# Altium PCB PCB.PcbDoc
Units mm, origin at the board's own origin, x right, y up, seen from the top; angles counter-clockwise.
Board outline 43 x 24 mm, 2 copper layers (Top Layer, Bottom Layer); 9 components, 8 nets, 23 pads, 6 vias.
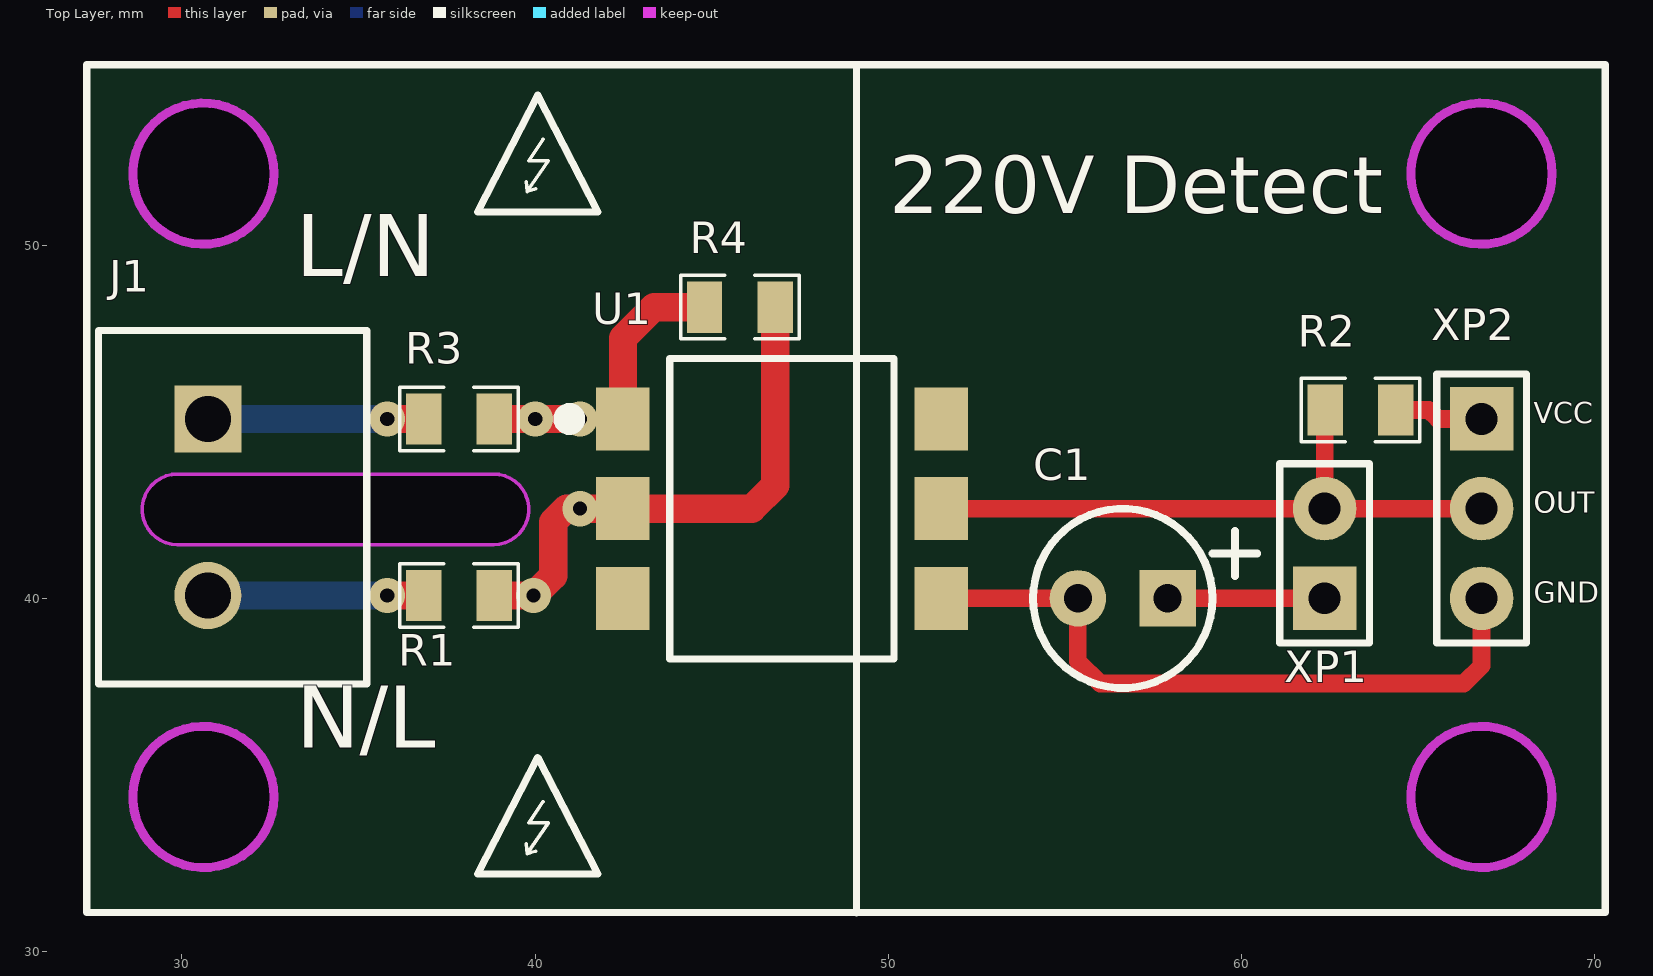
[diagram p0: Top Layer view]
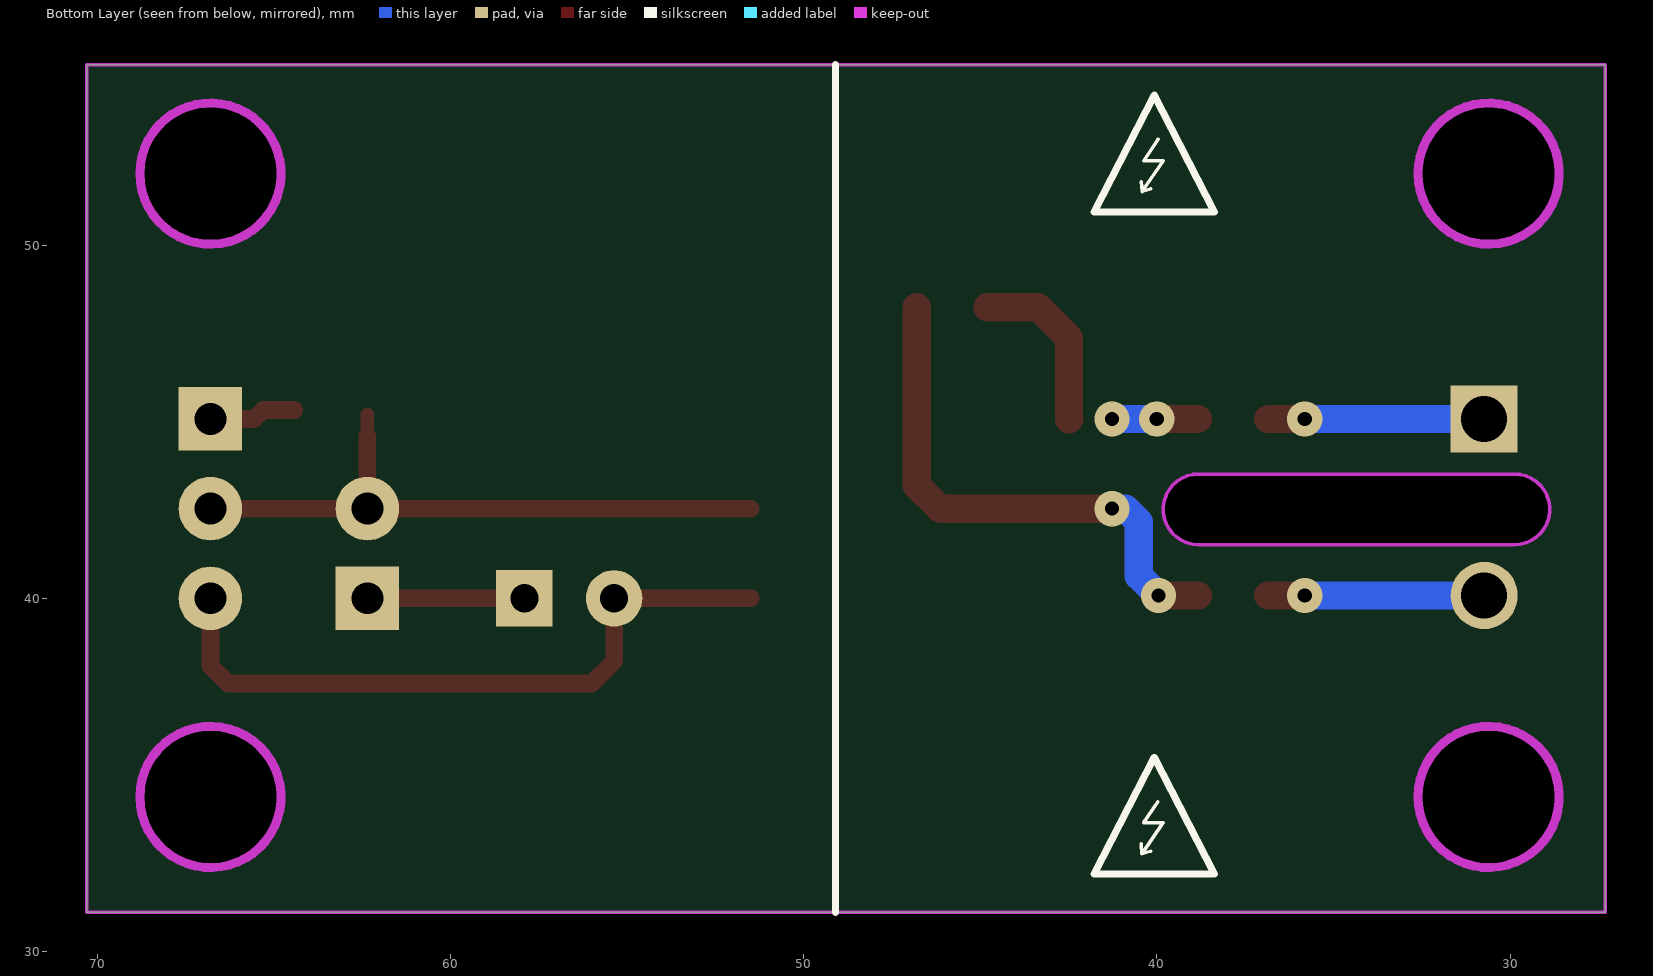
[diagram p1: Bottom Layer view, seen from below]
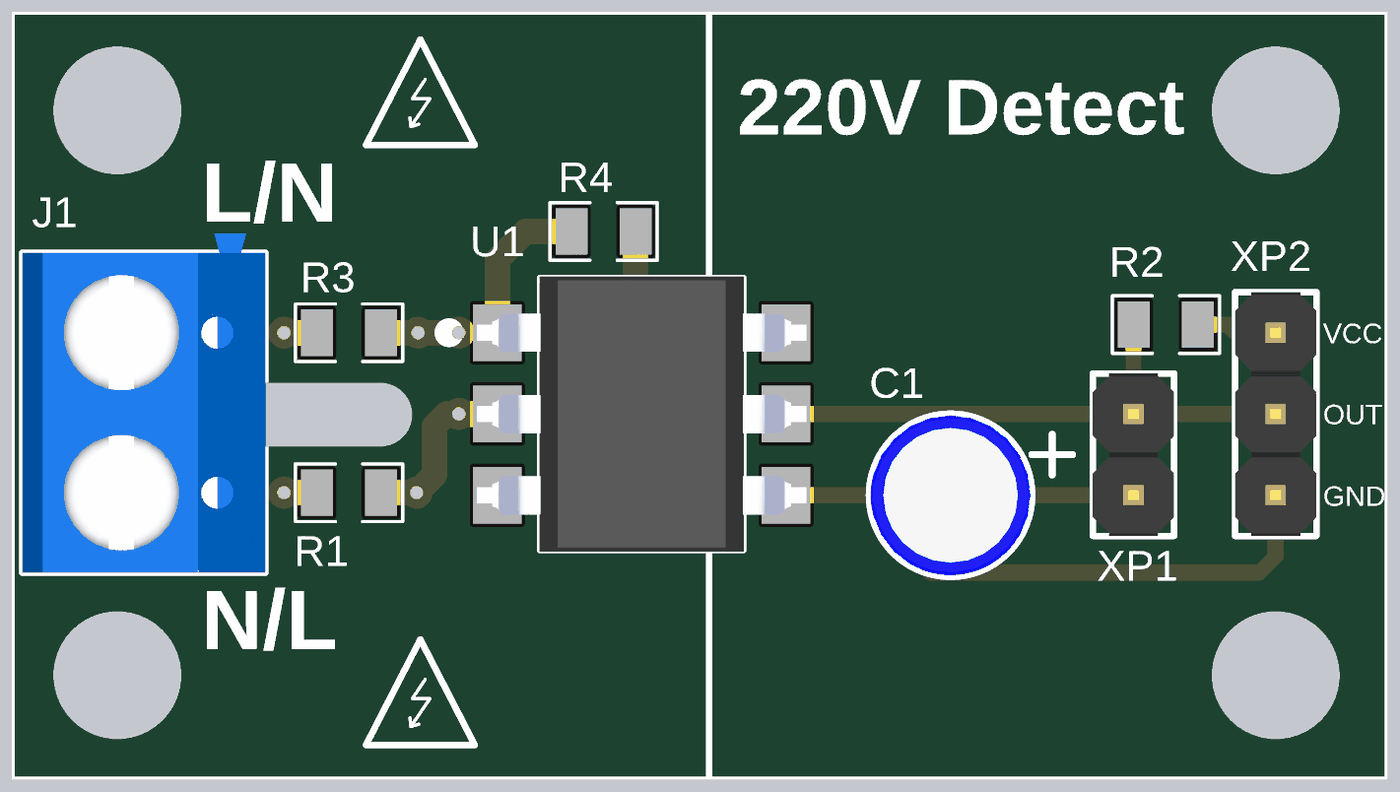
[diagram p2: 3D render of the assembled board from above, using the file's embedded part models]

## Layer stack, top to bottom
Top Solder: solder mask 0.0102, Solder Resist, Dk 3.5
Top Layer: signal copper 0.0356
Dielectric 1: dielectric 0.32, FR-4, Dk 4.8
Bottom Layer: signal copper 0.0356
Bottom Solder: solder mask 0.0102, Solder Resist, Dk 3.5

## Board outline
27.305,31.115 70.305,31.115 70.305,55.115 27.305,55.115
cut-out: 29.875,41.525 38.825,41.525 ccw(c38.825,42.525) 38.825,43.525 29.875,43.525 ccw(c29.875,42.525)
cut-out: 64.802,52.032 ccw(c66.802,52.032) 66.802,50.032 ccw(c66.802,52.032) 68.802,52.032 ccw(c66.802,52.032) 66.802,54.032 ccw(c66.802,52.032)
cut-out: 64.802,34.381 ccw(c66.802,34.381) 66.802,32.381 ccw(c66.802,34.381) 68.802,34.381 ccw(c66.802,34.381) 66.802,36.381 ccw(c66.802,34.381)
cut-out: 30.607,32.381 cw(c30.607,34.381) 28.607,34.381 cw(c30.607,34.381) 30.607,36.381 cw(c30.607,34.381) 32.607,34.381 cw(c30.607,34.381)
cut-out: 30.607,50.032 cw(c30.607,52.032) 28.607,52.032 cw(c30.607,52.032) 30.607,54.032 cw(c30.607,52.032) 32.607,52.032 cw(c30.607,52.032)

## Design rules (kind name [scope] priority, off if disabled: settings)
Clearance [All] p1: gap=0.254 ignorepadtopadclearanceinfootprint=FALSE except(0: Arc-Hole Track-Hole SMDPad-Hole THPad-Hole Via-Hole Fill-Hole Poly-Hole Region-Hole Text-Hole)
PolygonConnect [All] p1: connectstyle=Relief reliefconductorwidth=0.254 reliefentries=4 polygonreliefangle="90 Angle" airgapwidth=0.254
RoutingVias [All] p1: holewidth=0.711 width=1.27 viastyle="Through Hole" minholewidth=0.711 minwidth=1.27 maxholewidth=0.711 maxwidth=1.27
SolderMaskExpansion [All] p1: expansion=0.102
Width [All] p1: maxlimit=1 minlimit=0.254 preferedwidth=0.5 minimp=50.000000 maximp=50.000000 favimp=50.000000
30 further rules are at their usual default settings.

## Components (designator, comment, footprint, x,y, rotation, side; value= is the part's Value field where it differs from the comment)
C1 "CAP_ELEC_5*11" CAP_ELEC_5*11 56.642,40.005 r180 top
J1 "KF120-02P-14" DG301-5.0-02P-1X 30.734,45.085 r270 top
R1 "RES_SMD" RES0805 37.846,40.085 r0 top
R2 "RES_SMD" RES0805 63.373,45.339 r0 top
R3 "RES_SMD" RES0805 37.846,45.085 r0 top
R4 "RES_SMD" RES0805 45.8,48.25 r180 top
U1 "H11AA1SR2M" SMT-6 46.99,42.545 r0 top
XP1 "PLS-02" PLS-02 62.357,40.005 r90 top
XP2 "PLS-03" PLS-03 66.802,45.085 r270 top

## Footprints (in the part's own frame and the unit in brackets; to place one, negate y for a bottom-side part, rotate by r counter-clockwise, add the part's x,y. Pads: shape width x height; smd on the part's side, far side on the other; paste and mask are expansions set on the pad)
CAP_ELEC_5*11 [mm]
  round 1.6 hole 0.8: 1(1.27,0)
  rect 1.6x1.6 hole 0.8: 2(-1.27,0)
  silkscreen extent -3.81,-2.54 2.54,2.54, body extent -2.5,-2.5 2.5,2.5, height 11.9
DG301-5.0-02P-1X [mm]
  rect 1.9x1.9 hole 1.3 mask+0.102: 1(0,0)
  round 1.9 hole 1.3 mask+0.102: 2(5,0)
  silkscreen extent -2.5,-3.1 7.5,4.5, body extent -3.1,-3.1 7.5,4.5, height 10
PLS-02 [mm]
  rect 1.8x1.8 hole 0.9: 1(0,0)
  round 1.8 hole 0.9: 2(2.54,0)
  silkscreen extent -1.27,-1.27 3.81,1.27, body extent -1.27,-1.27 3.81,1.27, height 8.6
PLS-03 [mm]
  rect 1.8x1.8 hole 0.9: 1(0,0)
  round 1.8 hole 0.9: 2(2.54,0) 3(5.08,0)
  silkscreen extent -1.27,-1.27 6.35,1.27, body extent -1.27,-1.27 6.35,1.27, height 8.6
RES0805 [mm] "Chip Resistor, 2-Leads, Body 2,00x1,20mm, IPC Medium Density"
  rect 1x1.45 smd: 1(-1,0) 2(1,0)
  silkscreen extent -1.68,-0.9 1.68,0.9, body extent -1,-0.6 1,0.6, height 0.4
SMT-6 [mm] "SMT, 6-Leads, Body 8.51x6.35mm, Pitch 2.54mm"
  rect 1.52x1.78 smd: 1(-4.51,2.54) 2(-4.51,0) 3(-4.51,-2.54) 4(4.51,-2.54) 5(4.51,0) 6(4.51,2.54)
  silkscreen extent -6.22,-4.26 3.17,4.26, body extent -5.15,-4.3 5.15,4.3, height 4.38

## Part data
C1: "Electrolitic capacitor"
J1: library part Terminal_2, "Euro Terminal Block, 6 A, 150 V, -40 to 105 degC, Pitch 2.54 mm, 1x2 Position, Height 8.6 mm, Tail Length 3.3 mm", Color=Green, Contact Resistance="20 mOhm", Insulation Resistance="5000 MOhm / 1000 V", Manufacturer="Cixi KaiFeng", Rated Current="6 A", Rated Voltage="150 V", Temp. Range="-40 to 105 degC", Withstanding Voltage="AC 1500 V / 1 Min", ComponentLink1Description="Manufacturer URL", ComponentLink1URL=http://www.nb-kaifeng.com/, ComponentLink2Description=Datasheet, ComponentLink2URL=http://www.nb-kaifeng.com/upload/editor/ext_pdf/201305290533202245.pdf, Contact=Brass, Mounting Technology="Through Hole", No. of Pole=2, PackageDescription="Terminal Block, Pitch 2.54 mm, 1 x 2 Position, Height 8.6 mm, Tail Length 3.3 mm", PackageReference=KF120-2, PartNumber=KF120-02P-14, Pitch="Single Pitch"
U1: library part H11AA1, "AC Input Phototansistor Optocoupler, 1.17 V, 50 mA, -40 to 100 degC, 6-Pin SMT, RoHS, Tape and Reel", Current - DC Forward (If) (Max)=60mA, Current - Output / Channel=50mA, Current Transfer Ratio (Max)=-, Current Transfer Ratio (Min)=20%@10mA, Manufacturer="Fairchild Semiconductor", Operating temperature=-40癈~100癈, Package / Case=6-SMD, Package Description="6-Pin Surface Mount Device, Body 8.51 x 6.35 mm, Pitch 2.54 mm", Package Reference=SMT-6, Standard Package=1, Voltage - Forward (Vf) (Typ)=1.17V, Voltage - Isolation=4170Vrms, Voltage - Output (Max)=30V, Category=Isolators, Datasheet URL=https://www.fairchildsemi.com/datasheets/H1/H11AA1M.pdf, Datasheet Version="Rev. 1.3, 04/2015", Family=Optoisolators-Transistor,PhotovoltaicOutput, Input Type=AC,DC, Manufacturer URL=https://www.fairchildsemi.com/, Mounting Technology=SurfaceMount, Mounting Type=SurfaceMount, Number of Channels=1, Online Catalog=H11AA1M,2M,3M,4MSeries, Other Names=H11AA1SR2MDKR, Output Type=TransistorwithBase, Packaging=Digi-Reel®, Rise / Fall Time (Typ)=-, Series=-, Supplier Device Package=6-SMD, Turn On / Turn Off Time (Typ)=-, Vce Saturation (Max)=400mV
R1 R3: Val=100k
R2: Val=4.7k
R4: Val=N/C

## Via types
v1: diameter 1, hole 0.4, Top Layer to Bottom Layer, tented both sides, 6 vias

## Nets (pads, with @x,y where several pads share a name; then routed paths per layer and width w, separated by ;. In a path a pad name is that pad's centre, name@x,y a point inside that pad or via, vN(x,y) a via of type N, cw(c..) or ccw(c..) an arc to the next point about the centre after c; other vN are vias at no path point)
+5: R2.2 XP2.1 | length 2.5
  Top Layer w0.5: R2.2@64.425,45.339 65.311,45.339 65.565,45.085 XP2.1
GND: C1.1 U1.4 XP2.3 | length 19.5
  Top Layer w0.5: U1.4 C1.1 55.372,38.227 56.007,37.592 66.294,37.592 66.802,38.1 XP2.3
NetC1_2: C1.2 XP1.1 | length 3.7
  Top Layer w0.5: C1.2 XP1.1@61.595,40.005
NetJ1_1: J1.1 R3.1 | length 6.1
  Top Layer w0.8: v1(35.814,45.085) R3.1
  Bottom Layer w0.8: J1.1 v1(35.814,45.085)
NetJ1_2: J1.2 R1.1 | length 6.1
  Top Layer w0.8: v1(35.814,40.085) R1.1
  Bottom Layer w0.8: J1.2 v1(35.814,40.085)
NetR1_2: R1.2 R4.1 U1.2 | length 18.4
  Top Layer w0.8: R1.2 v1(39.958,40.085) 40.513,40.64 40.513,42.164 40.894,42.545 v1(41.275,42.545) U1.2 46.145,42.545 46.8,43.2 R4.1
  Bottom Layer w0.8: v1(39.958,40.085) 40.513,40.64 40.513,42.164 40.894,42.545 v1(41.275,42.545)
NetR2_1: R2.1 U1.5 XP1.2 XP2.2 | length 17.2
  Top Layer w0.381: XP1.2 XP1.2@62.365,42.553 ; 62.357,44.593 R2.1@62.357,45.212
  Top Layer w0.5: U1.5 XP1.2@61.595,42.545 ; 62.357,44.593 XP1.2 XP2.2
NetR3_2: R3.2 R4.2 U1.1 | length 8.7
  Top Layer w0.8: R3.2 v1(40.005,45.085) v1(41.275,45.085) ; U1.1@42.49,45.075 U1.1 42.49,45.095 42.49,47.375 43.365,48.25 R4.2
  Bottom Layer w0.8: v1(40.005,45.085) v1(41.275,45.085)
pads on no net: U1.3 U1.6

## Keep-outs
Keep-Out Layer:
  circle w0.254: c30.607,52.032 r2
  circle w0.254: c66.802,52.032 r2
  circle w0.254: c66.802,34.381 r2
  circle w0.254: c30.607,34.381 r2
  lines w0.1: 27.305,31.115 27.305,55.115 70.305,55.115 70.305,31.115 27.305,31.115 ; 29.875,41.525 cw(c29.875,42.525) 29.875,43.525 38.825,43.525 cw(c38.825,42.525) 38.825,41.525 29.875,41.525

## Silkscreen, mask and mechanical layers (free items; w line width, h text height)
Top Overlay:
  lines w0.1: 40.025,32.85 39.775,32.775 ; 40.025,51.6 39.775,51.525 ; 40.225,34.25 39.825,33.65 40.375,33.65 39.775,32.775 ; 40.225,53 39.825,52.4 40.375,52.4 39.775,51.525 ; 39.775,32.775 39.75,33.05 39.775,32.775 ; 39.775,51.525 39.75,51.8 39.775,51.525
  lines w0.2: 40.073,35.5 41.775,32.2 38.375,32.2 40.075,35.5 ; 40.075,54.25 41.775,50.95 38.375,50.95 40.077,54.25 ; 27.305,31.115 70.305,31.115 ; 27.305,31.115 27.305,55.115 ; 27.305,31.115 70.305,31.115 ; 27.305,31.115 27.305,55.115 ; 27.305,55.115 70.305,55.115 ; 27.305,55.115 70.305,55.115 ; 70.305,31.115 70.305,55.115 ; 70.305,31.115 70.305,55.115 ; 49.1,31.1 49.1,55.1 49.1,31.1 ; 49.1,31.115 49.1,55.115 49.1,31.115
  text "220V Detect" at 50.025,50.375 h2.8
  text "L/N" at 33.225,48.55 h3
  text "VCC" at 68.28,44.758 h1
  text "OUT" at 68.28,42.225 h1
  text "OUT" at 68.28,42.225 h1
  text "GND" at 68.28,39.675 h1
  text "N/L" at 33.234,35.2 h3
  text "N/L" at 33.234,35.2 h3
Bottom Overlay:
  lines w0.1: 39.97,53 40.37,52.4 39.82,52.4 40.42,51.525 ; 39.975,34.25 40.375,33.65 39.825,33.65 40.425,32.775 ; 40.17,51.6 40.42,51.525 ; 40.175,32.85 40.425,32.775 ; 40.42,51.525 40.445,51.8 40.42,51.525 ; 40.425,32.775 40.45,33.05 40.425,32.775
  lines w0.2: 40.073,54.25 41.775,50.95 38.375,50.95 40.075,54.25 ; 40.075,35.5 41.775,32.2 38.375,32.2 40.077,35.5 ; 49.1,31.115 49.1,55.115